# EAGLE board LM399_reference_board (EAGLE 7.2.0)
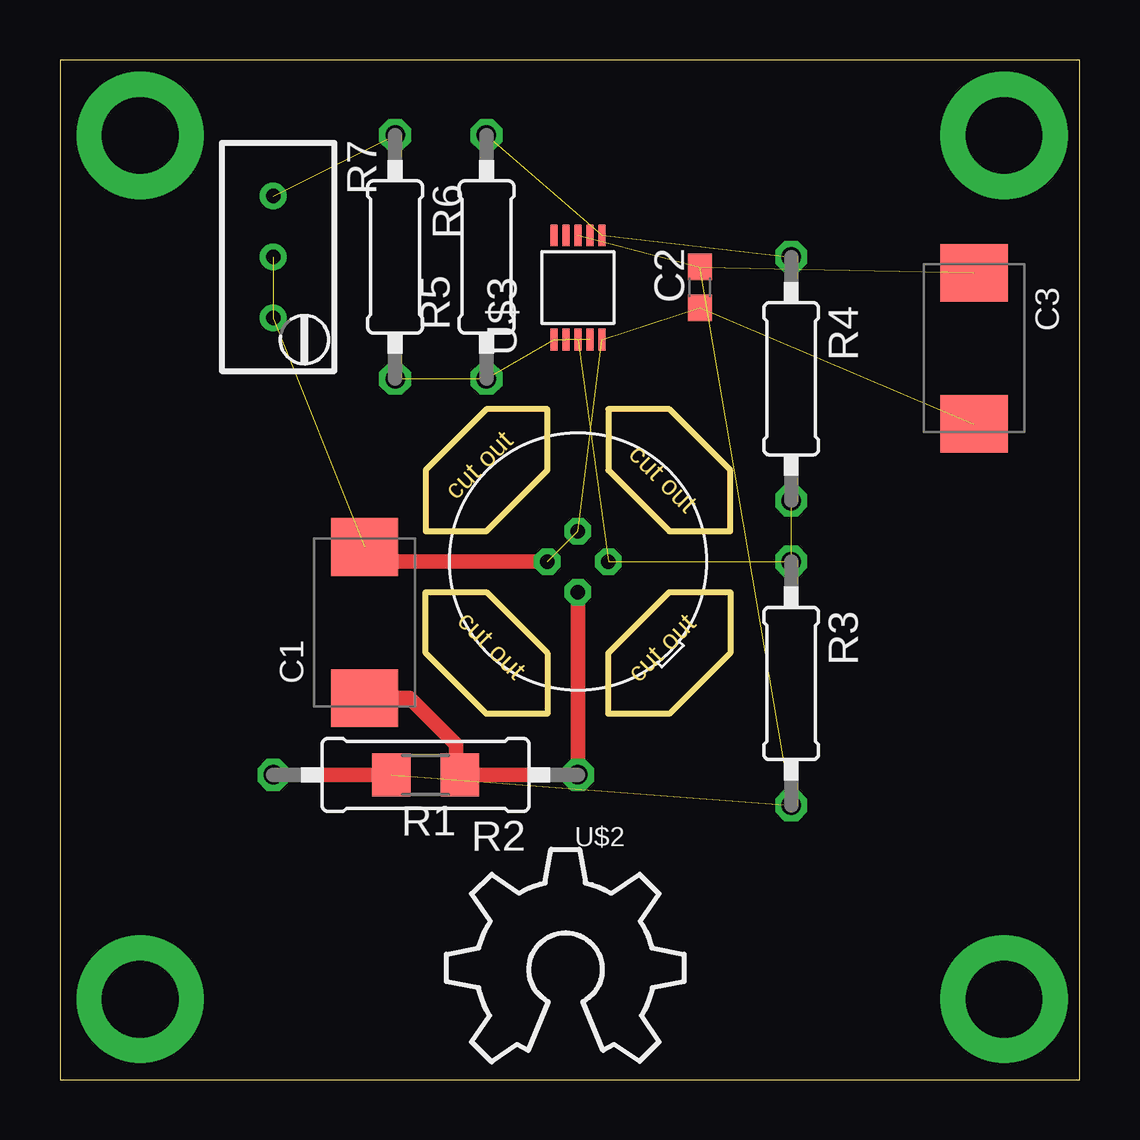
[diagram p0: board, top side]

Size 42.5 x 42.5 mm. Coordinates in mm from the lower left corner, seen from the top.
Outline: 0,0 42.5,0 42.5,42.5 0,42.5 0,0
Outline: 17.78,22.86 20.32,25.4 20.32,27.94 17.78,27.94 15.24,25.4 15.24,22.86 17.78,22.86
Outline: 22.86,27.94 22.86,25.4 25.4,22.86 27.94,22.86 27.94,25.4 25.4,27.94 22.86,27.94
Outline: 25.4,20.32 27.94,20.32 27.94,17.78 25.4,15.24 22.86,15.24 22.86,17.78 25.4,20.32
Outline: 15.24,20.32 17.78,20.32 20.32,17.78 20.32,15.24 17.78,15.24 15.24,17.78 15.24,20.32
Copper layers (1*16): Top 0.035mm / dielectric 1.5mm / Bottom 0.035mm
Design rules "default": minimum track width 10mil, minimum drill 24mil, track to track 8mil, track to pad 8mil, pad to pad 8mil, via to via 8mil, smd to smd 8mil, copper to edge 40mil, drill to drill 8mil, minimum pad ring 10mil, minimum via ring 8mil, stop-mask expansion 4mil, vias tented up to drill 0mil, thermal gap 10mil

## Footprints (pad centres in the part's own frame; a part is rotated, then mirrored left to right if it is on the bottom)
SMC_D = smd 2.4 x 2.8: + -3.15,0; - 3.15,0
C0603 = smd 1.1 x 1: 1 -0.85,0; 2 0.85,0
R1206 = smd 1.6 x 1.803: 1 -1.422,0; 2 1.422,0
0309/12 = drill 0.813 octagon: 1 -6.35,0; 2 6.35,0
0207/10 = drill 0.813 octagon: 1 -5.08,0; 2 5.08,0
RTRIMT93YA = drill 0.61: 1 0,-2.54; 2 0,0; 3 0,2.54
H4-TO46-4PIN = drill 0.6 octagon: 1 -1.27,0; 2 0,-1.27; 3 1.27,0; 4 0,1.27
MS-MSOP10 = smd 0.9 x 0.3: 1 -2.175,1; 2 -2.175,0.5; 3 -2.175,0; 4 -2.175,-0.5; 5 -2.175,-1; 6 2.175,-1; 7 2.175,-0.5; 8 2.175,0; 9 2.175,0.5; 10 2.175,1

## Placement (x,y rotation side)
C1  10u  [SMC_D]  12.7,19.05 90 top
C2  100n  [C0603]  26.67,33.02 90 top
C3  10u  [SMC_D]  38.1,30.48 270 top
R1  inrush  [R1206]  15.24,12.7 180 top
R2  inrush  [0309/12]  15.24,12.7 180 top
R3  220k  [0207/10]  30.48,16.51 270 top
R4  5k  [0207/10]  30.48,29.21 270 top
R5  8.8k  [0207/10]  17.78,34.29 90 top
R6  19k  [0207/10]  13.97,34.29 270 top
R7  [RTRIMT93YA]  8.89,34.29 180 top
U$1  [OSHW_8X350_NOTEXT]  16.11,0.73 0 top
U$2  LM399  [H4-TO46-4PIN]  21.59,21.59 180 top
U$3  LTC2057  [MS-MSOP10]  21.59,33.02 90 top

## Library data of the parts
C1-C3 R1-R7 = SquantorRCL
U$1 = ohw-logo
U$2 U$3 = SquantorLinearTechnology

## Nets
+15V: C2.2 C3.+ R1.2 R2.2 R3.2 U$3.8
GND: C1.- C2.1 C3.- R7.2 R7.3 U$2.2 U$2.3 U$3.5
N$5: C1.+ R1.1 R2.1 U$2.4
N$6: R5.1 R6.2 U$3.1 U$3.2 U$3.4
N$7: R4.1 R5.2 U$3.6
N$8: R6.1 R7.1
VZENER: R3.1 R4.2 U$2.1 U$3.3

## Tracks (layer width: path | path; a pad name or v marks a point on that pad's centre or on a via)
+15V  (4 unrouted)
  Top 0.61: R2.2 R1.2
GND  (6 unrouted)
  Top 0.61: U$2.3 13.31,21.59 C1.-
N$1  (via drill 3.2 pad 5.3)
  other vias: 3.35,3.35
N$2  (via drill 3.2 pad 5.3)
  other vias: 39.35,3.35
N$3  (via drill 3.2 pad 5.3)
  other vias: 39.35,39.35
N$4  (via drill 3.2 pad 5.3)
  other vias: 3.35,39.35
N$5
  Top 0.61: C1.+ 14.58,15.9 16.51,13.97 16.51,12.85 R1.1 R2.1 U$2.4
N$6  (4 unrouted)
N$7  (2 unrouted)
N$8  (1 unrouted)
VZENER  (3 unrouted)

## Text on the board
Dimension: cut out | cut out | cut out | cut out